# Altium PCB daboard.PcbDoc (part 1 of 2)
Units mil, origin at the board's own origin, x right, y up, seen from the top; angles counter-clockwise.
Board outline 3875 x 2400 mil, 2 copper layers (Top Layer, Bottom Layer); 197 components, 182 nets, 856 pads, 128 vias.
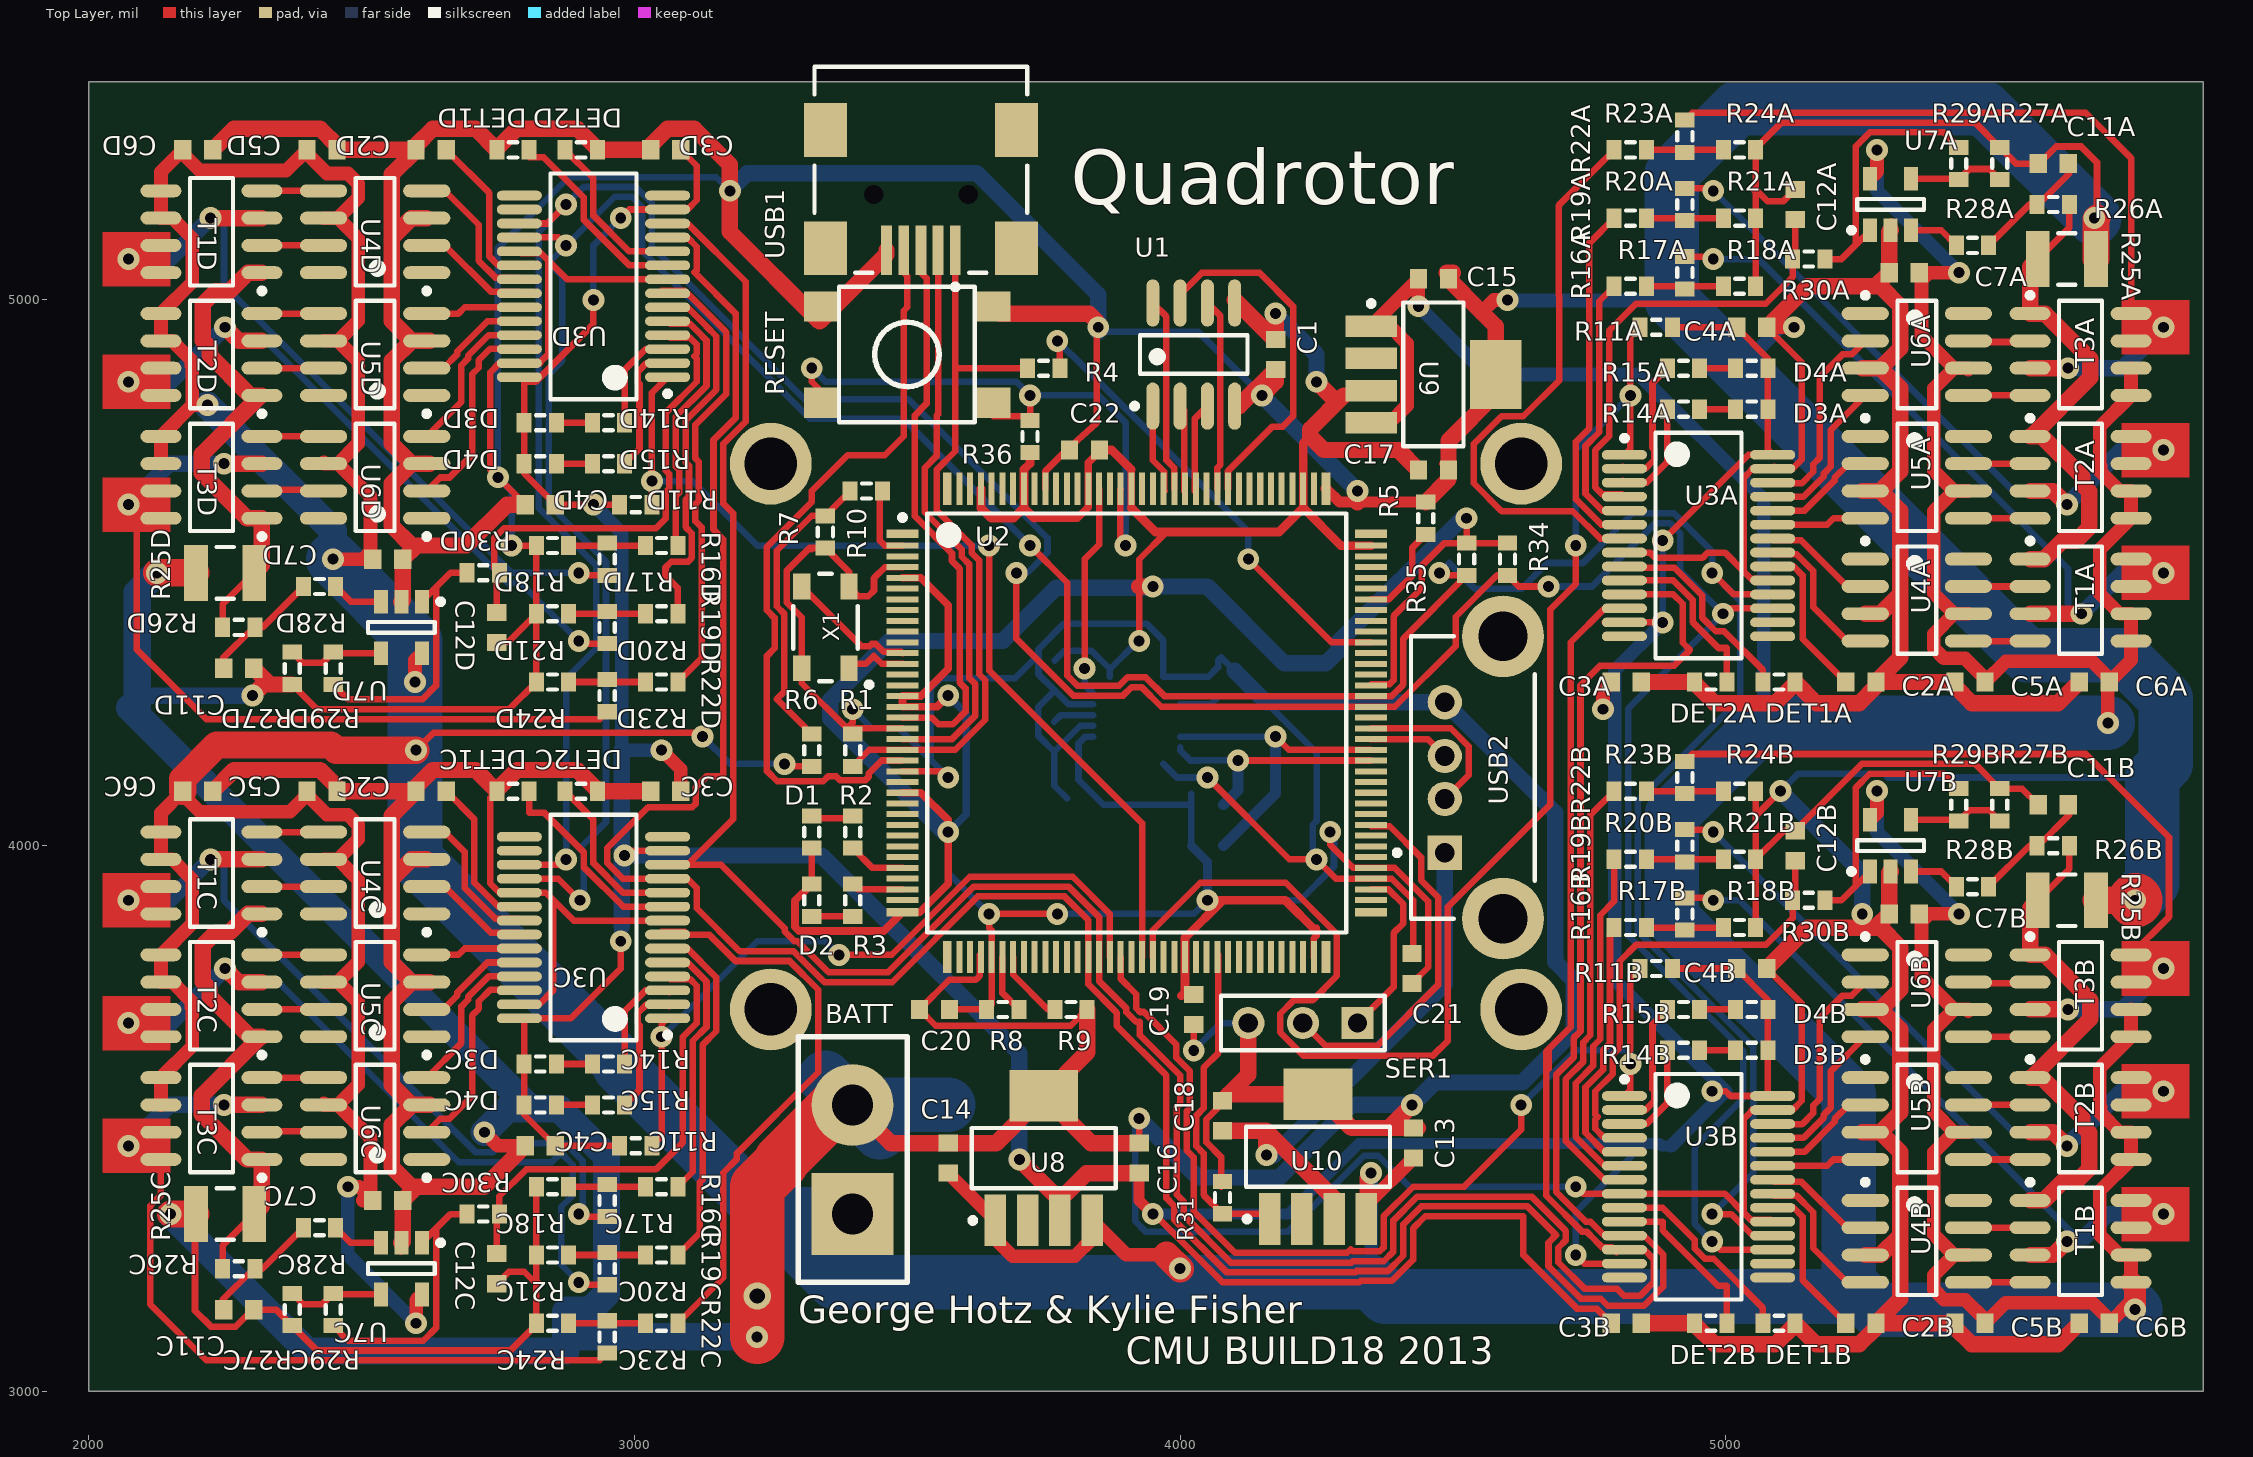
[diagram p0: Top Layer view]
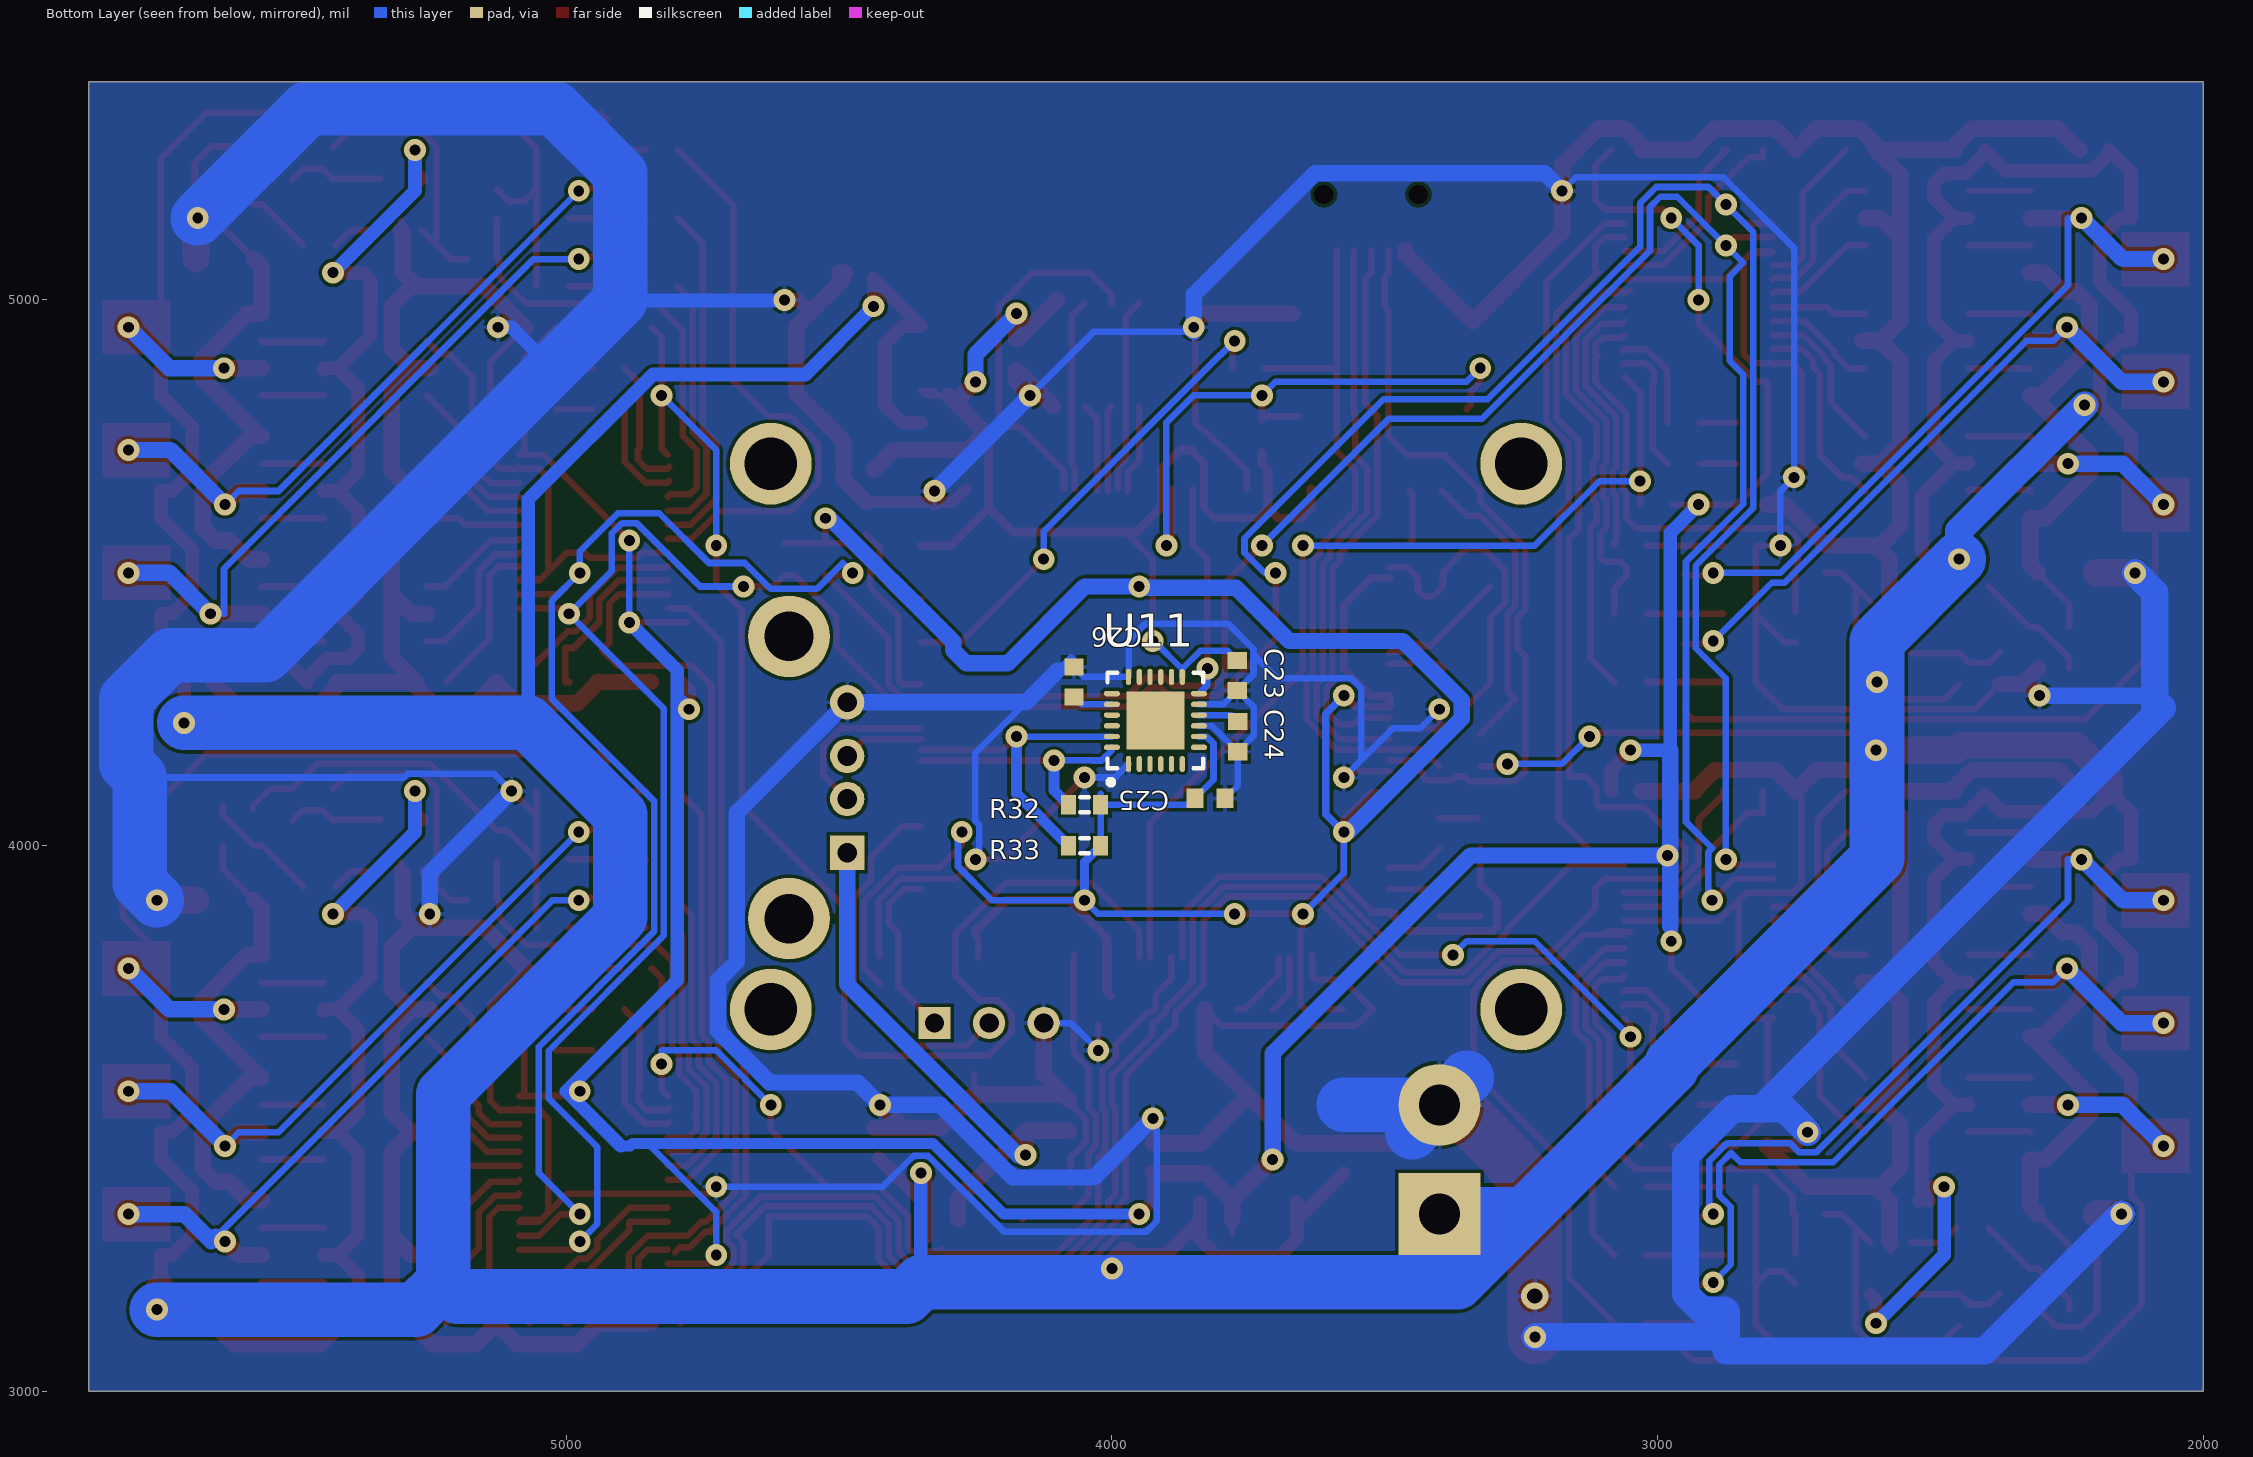
[diagram p1: Bottom Layer view, seen from below]

## Layer stack, top to bottom
Top Layer: signal copper 1.4
Dielectric: dielectric 12.6, FR-4, Dk 4.8
Bottom Layer: signal copper 1.4

## Board outline
2000,3000 2000,5400 5875,5400 5875,3000

## Design rules (kind name [scope] priority, off if disabled: settings)
Clearance "Clearance~Sunstone Circuits" [All] p1: gap=6 // Sunstone Circuits Minimum Clearance Rule (Double Sided)
HoleSize "HoleSize~Sunstone Circuits" [All] p1: absolutevalues=TRUE maxlimit=251 minlimit=16 maxpercent=80.000 minpercent=20.000 // SSC Hole Size Rule For Single Sided & Double Sided Designs.
HoleSize Testpoint [All] p2: absolutevalues=TRUE maxlimit=100 minlimit=1 maxpercent=80.000 minpercent=20.000
HoleSize TestPointUsage [All] p3: absolutevalues=TRUE maxlimit=100 minlimit=1 maxpercent=80.000 minpercent=20.000
MinimumAnnularRing "MinimumAnnularRing~Sunstone Circuits" [All] p1: minimumring=7 // Sunstone Circuits Minimum Annular Ring (Double Sided)
PlaneClearance "PlaneClearance~Sunstone Circuits" [All] p1: clearance=12 // Sunstone Circuits Power Plane Clearance Rule (Double Sided)
PlaneConnect "PlaneConnect~Sunstone Circuits" [All] p1: planeconnectstyle=Relief reliefexpansion=10 reliefentries=4 reliefconductorwidth=8 reliefairgap=10 // Sunstone Circuits Power Plane Connect Rule (Double Sided)
PolygonConnect "PolygonConnect~Sunstone Circuits" [All] p1: connectstyle=Relief reliefconductorwidth=8 reliefentries=4 polygonreliefangle="90 Angle" // Sunstone Circuits Polygon Connect Style (Double Sided)
RoomDefinition M2 [InComponentClass('M2')] p1: confinementstyle=ConfineIn formatcopy=TRUE lockcomponents=FALSE outline 4675,3025 5850,3025 5850,4200 4675,4200
RoomDefinition M4 [InComponentClass('M4')] p2: confinementstyle=ConfineIn formatcopy=TRUE lockcomponents=FALSE outline 3200,4200 2025,4200 2025,5375 3200,5375
RoomDefinition M3 [InComponentClass('M3')] p3: confinementstyle=ConfineIn formatcopy=TRUE lockcomponents=FALSE outline 2025,4200 3200,4200 3200,3025 2025,3025
RoomDefinition M1 [InComponentClass('M1')] p4: confinementstyle=ConfineIn formatcopy=FALSE lockcomponents=FALSE outline 4675,5375 5850,5375 5850,4200 4675,4200
RoomDefinition power [InComponentClass('power')] p5: confinementstyle=ConfineIn formatcopy=TRUE lockcomponents=FALSE outline 3225,3175 4550,3175 4550,3675 3225,3675
RoomDefinition mcu [InComponentClass('mcu')] p6: confinementstyle=ConfineIn formatcopy=TRUE lockcomponents=FALSE outline 3200,3600 4675,3600 4675,5450 3200,5450
RoomDefinition imu [InComponentClass('imu')] p7: confinementstyle=ConfineIn formatcopy=TRUE lockcomponents=FALSE outline 3670.28,4424.8 3670.28,4049.8 4095.28,4049.8 4095.28,4424.8
RoutingVias "RoutingVias~Sunstone Circuits" [All] p1: holewidth=16 width=30 viastyle="Through Hole" minholewidth=16 minwidth=30 maxholewidth=20 maxwidth=40 // Sunstone Circuits Routing Vias Rule (Double Sided)
ShortCircuit "ShortCircuit~Sunstone Circuits" [All] p1: allowed=FALSE // Sunstone Circuits Short Circuit Rule~Do Not Allow (Double Sided)
SilkscreenOverComponentPads [All] p1: minsilkscreentomaskgap=10
SolderMaskExpansion "SolderMaskExpansion~Sunstone Circuits" [All] p1: expansion=3 // Sunstone Circuits Solder Mask Expansion Rule (Double Sided)
ViasUnderSMD "ViasUnderSMD~Sunstone Circuits" [All] p1: allowed=FALSE // Sunstone Circuits Vias Under SMD~Do Not Allow (Double Sided)
Width "Width~Sunstone Circuits" [All] p1: maxlimit=100 minlimit=6 preferedwidth=10 // Sunstone Circuits Minimum Width Rule (Double Sided)
23 further rules are at their usual default settings.

## Classes and differential pairs
channel class motor_controller: M1 M2 M3 M4
component class M2: C2B C3B C4B C5B C6B C7B C11B C12B D3B D4B DET1B DET2B R11B R14B R15B R16B R17B R18B R19B R20B R21B R22B R23B R24B R25B R26B R27B R28B R29B R30B T1B T2B T3B U3B U4B U5B U6B U7B
component class imu: C23 C24 C25 C26 U11
component class mcu: C1 C15 C17 C19 C20 C21 C22 D1 D2 R1 R2 R3 R4 R5 R6 R7 R8 R9 R10 R32 R33 R34 R35 R36 RESET SER1 U1 U2 U9 USB1 USB2 X1
component class power: BATT C13 C14 C16 C18 R31 U8 U10
component class M1: C2A C3A C4A C5A C6A C7A C11A C12A D3A D4A DET1A DET2A R11A R14A R15A R16A R17A R18A R19A R20A R21A R22A R23A R24A R25A R26A R27A R28A R29A R30A T1A T2A T3A U3A U4A U5A U6A U7A
component class M3: C2C C3C C4C C5C C6C C7C C11C C12C D3C D4C DET1C DET2C R11C R14C R15C R16C R17C R18C R19C R20C R21C R22C R23C R24C R25C R26C R27C R28C R29C R30C T1C T2C T3C U3C U4C U5C U6C U7C
component class M4: C2D C3D C4D C5D C6D C7D C11D C12D D3D D4D DET1D DET2D R11D R14D R15D R16D R17D R18D R19D R20D R21D R22D R23D R24D R25D R26D R27D R28D R29D R30D T1D T2D T3D U3D U4D U5D U6D U7D

## Components (designator, comment, footprint, x,y, rotation, side; value= is the part's Value field where it differs from the comment)
BATT "BS2" PCBComponent_1 3400,3425 r90 top
C1 "0.1uF" 1608[0603] 4175,4900 r90 top
C2A "10uF" 1608[0603] 5247.44,4300 r180 top (schematic designator C2)
C2B "10uF" 1608[0603] 5247.44,3125 r180 top (schematic designator C2)
C2C "10uF" 1608[0603] 2627.56,4100 r0 top (schematic designator C2)
C2D "10uF" 1608[0603] 2627.56,5275 r0 top (schematic designator C2)
C3A "0.1uF" 1608[0603] 4817.52,4300 r180 top (schematic designator C3)
C3B "0.1uF" 1608[0603] 4817.52,3125 r180 top (schematic designator C3)
C3C "0.1uF" 1608[0603] 3057.48,4100 r0 top (schematic designator C3)
C3D "0.1uF" 1608[0603] 3057.48,5275 r0 top (schematic designator C3)
C4A "0.1uF" 1608[0603] 5047.44,4950 r180 top (schematic designator C4)
C4B "0.1uF" 1608[0603] 5047.44,3775 r180 top (schematic designator C4)
C4C "0.1uF" 1608[0603] 2827.56,3450 r0 top (schematic designator C4)
C4D "0.1uF" 1608[0603] 2827.56,4625 r0 top (schematic designator C4)
C5A "1uF" 1608[0603] 5447.44,4300 r0 top (schematic designator C5)
C5B "1uF" 1608[0603] 5447.44,3125 r0 top (schematic designator C5)
C5C "1uF" 1608[0603] 2427.56,4100 r180 top (schematic designator C5)
C5D "1uF" 1608[0603] 2427.56,5275 r180 top (schematic designator C5)
C6A "1uF" 1608[0603] 5675,4300 r0 top (schematic designator C6)
C6B "1uF" 1608[0603] 5675,3125 r0 top (schematic designator C6)
C6C "1uF" 1608[0603] 2200,4100 r180 top (schematic designator C6)
C6D "1uF" 1608[0603] 2200,5275 r180 top (schematic designator C6)
C7A "1uF" 1608[0603] 5326.97,5050 r0 top (schematic designator C7)
C7B "1uF" 1608[0603] 5326.97,3875 r0 top (schematic designator C7)
C7C "1uF" 1608[0603] 2548.03,3350 r180 top (schematic designator C7)
C7D "1uF" 1608[0603] 2548.03,4525 r180 top (schematic designator C7)
C11A "56pF" 1608[0603] 5600,5250 r0 top (schematic designator C11)
C11B "56pF" 1608[0603] 5600,4075 r0 top (schematic designator C11)
C11C "56pF" 1608[0603] 2275,3150 r180 top (schematic designator C11)
C11D "56pF" 1608[0603] 2275,4325 r180 top (schematic designator C11)
C12A "33pF" 1608[0603] 5126.97,5175 r270 top (schematic designator C12)
C12B "33pF" 1608[0603] 5126.97,4000 r270 top (schematic designator C12)
C12C "33pF" 1608[0603] 2748.03,3225 r90 top (schematic designator C12)
C12D "33pF" 1608[0603] 2748.03,4400 r90 top (schematic designator C12)
C13 "1uF" 1608[0603] 4427.56,3455.12 r270 top
C14 "1uF" 1608[0603] 3575,3427.56 r270 top
C15 "1uF" 1608[0603] 4464.17,5038.58 r180 top
C16 "1uF" 1608[0603] 3925,3427.56 r270 top
C17 "1uF" 1608[0603] 4464.17,4688.58 r180 top
C18 "1uF" 1608[0603] 4077.56,3505.12 r270 top
C19 "0.1uF" 1608[0603] 4025,3700 r90 top
C20 "0.1uF" 1608[0603] 3550,3700 r0 top
C21 "0.1uF" 1608[0603] 4425,3775 r270 top
C22 "0.1uF" 1608[0603] 3825,4725 r0 top
C23 "" 1608[0603] 3770.28,4311.81 r90 bottom
C24 "" 1608[0603] 3769.49,4199.8 r90 bottom
C25 "" 1608[0603] 3820.28,4086.81 r180 bottom
C26 "" 1608[0603] 4069.49,4299.8 r90 bottom
D1 "LED" J1-0603 3325,4025 r90 top
D2 "LED" J1-0603 3325,3900 r270 top
D3A "LED" J1-0603 5047.44,4800 r180 top (schematic designator D3)
D3B "LED" J1-0603 5047.44,3625 r180 top (schematic designator D3)
D3C "LED" J1-0603 2827.56,3600 r0 top (schematic designator D3)
D3D "LED" J1-0603 2827.56,4775 r0 top (schematic designator D3)
D4A "LED" J1-0603 5047.44,4875 r180 top (schematic designator D4)
D4B "LED" J1-0603 5047.44,3700 r180 top (schematic designator D4)
D4C "LED" J1-0603 2827.56,3525 r0 top (schematic designator D4)
D4D "LED" J1-0603 2827.56,4700 r0 top (schematic designator D4)
DET1A "1k" J1-0603 5097.44,4300 r180 top (schematic designator DET1)
DET1B "1k" J1-0603 5097.44,3125 r180 top (schematic designator DET1)
DET1C "1k" J1-0603 2777.56,4100 r0 top (schematic designator DET1)
DET1D "1k" J1-0603 2777.56,5275 r0 top (schematic designator DET1)
DET2A "1k" J1-0603 4972.44,4300 r0 top (schematic designator DET2)
DET2B "1k" J1-0603 4972.44,3125 r0 top (schematic designator DET2)
DET2C "1k" J1-0603 2902.56,4100 r180 top (schematic designator DET2)
DET2D "1k" J1-0603 2902.56,5275 r180 top (schematic designator DET2)
R1 "10K" J1-0603 3400,4175 r270 top
R2 "470R" J1-0603 3400,4025 r270 top
R3 "470R" J1-0603 3400,3900 r90 top
R4 "1K" J1-0603 3750,4875 r0 top
R5 "1K" J1-0603 4450,4600 r270 top
R6 "1k" J1-0603 3325,4175 r90 top
R7 "1k" J1-0603 3350,4575 r270 top
R8 "1K" J1-0603 3675,3700 r0 top
R9 "1K" J1-0603 3800,3700 r180 top
R10 "1k" J1-0603 3425,4650 r180 top
R11A "10k" J1-0603 4872.44,4950 r180 top (schematic designator R11)
R11B "10k" J1-0603 4872.44,3775 r180 top (schematic designator R11)
R11C "10k" J1-0603 3002.56,3450 r0 top (schematic designator R11)
R11D "10k" J1-0603 3002.56,4625 r0 top (schematic designator R11)
R14A "470R" J1-0603 4922.44,4800 r180 top (schematic designator R14)
R14B "470R" J1-0603 4922.44,3625 r180 top (schematic designator R14)
R14C "470R" J1-0603 2952.56,3600 r0 top (schematic designator R14)
R14D "470R" J1-0603 2952.56,4775 r0 top (schematic designator R14)
R15A "470R" J1-0603 4922.44,4875 r180 top (schematic designator R15)
R15B "470R" J1-0603 4922.44,3700 r180 top (schematic designator R15)
R15C "470R" J1-0603 2952.56,3525 r0 top (schematic designator R15)
R15D "470R" J1-0603 2952.56,4700 r0 top (schematic designator R15)
R16A "330R" J1-0603 4825,5025 r0 top (schematic designator R16)
R16B "330R" J1-0603 4825,3850 r0 top (schematic designator R16)
R16C "330R" J1-0603 3050,3375 r180 top (schematic designator R16)
R16D "330R" J1-0603 3050,4550 r180 top (schematic designator R16)
R17A "10k" J1-0603 4925,5050 r270 top (schematic designator R17)
R17B "10k" J1-0603 4925,3875 r270 top (schematic designator R17)
R17C "10k" J1-0603 2950,3350 r90 top (schematic designator R17)
R17D "10k" J1-0603 2950,4525 r90 top (schematic designator R17)
R18A "1.74k" J1-0603 5025,5025 r0 top (schematic designator R18)
R18B "1.74k" J1-0603 5025,3850 r0 top (schematic designator R18)
R18C "1.74k" J1-0603 2850,3375 r180 top (schematic designator R18)
R18D "1.74k" J1-0603 2850,4550 r180 top (schematic designator R18)
R19A "330R" J1-0603 4825,5150 r0 top (schematic designator R19)
R19B "330R" J1-0603 4825,3975 r0 top (schematic designator R19)
R19C "330R" J1-0603 3050,3250 r180 top (schematic designator R19)
R19D "330R" J1-0603 3050,4425 r180 top (schematic designator R19)
R20A "10k" J1-0603 4925,5175 r270 top (schematic designator R20)
R20B "10k" J1-0603 4925,4000 r270 top (schematic designator R20)
R20C "10k" J1-0603 2950,3225 r90 top (schematic designator R20)
R20D "10k" J1-0603 2950,4400 r90 top (schematic designator R20)
R21A "1.74k" J1-0603 5025,5150 r0 top (schematic designator R21)
R21B "1.74k" J1-0603 5025,3975 r0 top (schematic designator R21)
R21C "1.74k" J1-0603 2850,3250 r180 top (schematic designator R21)
R21D "1.74k" J1-0603 2850,4425 r180 top (schematic designator R21)
R22A "330R" J1-0603 4825,5275 r0 top (schematic designator R22)
R22B "330R" J1-0603 4825,4100 r0 top (schematic designator R22)
R22C "330R" J1-0603 3050,3125 r180 top (schematic designator R22)
R22D "330R" J1-0603 3050,4300 r180 top (schematic designator R22)
R23A "10k" J1-0603 4925,5300 r90 top (schematic designator R23)
R23B "10k" J1-0603 4925,4125 r90 top (schematic designator R23)
R23C "10k" J1-0603 2950,3100 r270 top (schematic designator R23)
R23D "10k" J1-0603 2950,4275 r270 top (schematic designator R23)
R24A "1.74k" J1-0603 5025,5275 r0 top (schematic designator R24)
R24B "1.74k" J1-0603 5025,4100 r0 top (schematic designator R24)
R24C "1.74k" J1-0603 2850,3125 r180 top (schematic designator R24)
R24D "1.74k" J1-0603 2850,4300 r180 top (schematic designator R24)
R25A "50m" 14-1210 5625,5075 r180 top (schematic designator R25)
R25B "50m" 14-1210 5625,3900 r180 top (schematic designator R25)
R25C "50m" 14-1210 2250,3325 r0 top (schematic designator R25)
R25D "50m" 14-1210 2250,4500 r0 top (schematic designator R25)
R26A "1K" J1-0603 5600,5175 r180 top (schematic designator R26)
R26B "1K" J1-0603 5600,4000 r180 top (schematic designator R26)
R26C "1K" J1-0603 2275,3225 r0 top (schematic designator R26)
R26D "1K" J1-0603 2275,4400 r0 top (schematic designator R26)
R27A "2K" J1-0603 5501.97,5250 r270 top (schematic designator R27)
R27B "2K" J1-0603 5501.97,4075 r270 top (schematic designator R27)
R27C "2K" J1-0603 2373.03,3150 r90 top (schematic designator R27)
R27D "2K" J1-0603 2373.03,4325 r90 top (schematic designator R27)
R28A "1K" J1-0603 5451.97,5100 r180 top (schematic designator R28)
R28B "1K" J1-0603 5451.97,3925 r180 top (schematic designator R28)
R28C "1K" J1-0603 2423.03,3300 r0 top (schematic designator R28)
R28D "1K" J1-0603 2423.03,4475 r0 top (schematic designator R28)
R29A "100K" J1-0603 5426.97,5250 r90 top (schematic designator R29)
R29B "100K" J1-0603 5426.97,4075 r90 top (schematic designator R29)
R29C "100K" J1-0603 2448.03,3150 r270 top (schematic designator R29)
R29D "100K" J1-0603 2448.03,4325 r270 top (schematic designator R29)
R30A "1K" J1-0603 5151.97,5075 r180 top (schematic designator R30)
R30B "1K" J1-0603 5151.97,3900 r180 top (schematic designator R30)
R30C "1K" J1-0603 2723.03,3325 r0 top (schematic designator R30)
R30D "1K" J1-0603 2723.03,4500 r0 top (schematic designator R30)
R31 "10k" J1-0603 4077.56,3355.12 r270 top
R32 "4.7k" J1-0603 4050,4075 r180 bottom
R33 "4.7k" J1-0603 4050,4000 r180 bottom
R34 "4.7k" J1-0603 4600,4525 r90 top
R35 "4.7k" J1-0603 4525,4525 r90 top
R36 "4.7k" J1-0603 3725,4750 r270 top
RESET "BUTTON" B3FS_SWITCH 3500,4900 r0 top
SER1 "Header 3" HDR1X3 4325,3675 r180 top
T1A "SI4532DY" SOIC127P600-8L 5650,4450 r0 top (schematic designator T1)
T1B "SI4532DY" SOIC127P600-8L 5650,3275 r0 top (schematic designator T1)
T1C "SI4532DY" SOIC127P600-8L 2225,3950 r180 top (schematic designator T1)
T1D "SI4532DY" SOIC127P600-8L 2225,5125 r180 top (schematic designator T1)
T2A "SI4532DY" SOIC127P600-8L 5650,4675 r0 top (schematic designator T2)
T2B "SI4532DY" SOIC127P600-8L 5650,3500 r0 top (schematic designator T2)
T2C "SI4532DY" SOIC127P600-8L 2225,3725 r180 top (schematic designator T2)
T2D "SI4532DY" SOIC127P600-8L 2225,4900 r180 top (schematic designator T2)
T3A "SI4532DY" SOIC127P600-8L 5650,4900 r0 top (schematic designator T3)
T3B "SI4532DY" SOIC127P600-8L 5650,3725 r0 top (schematic designator T3)
T3C "SI4532DY" SOIC127P600-8L 2225,3500 r180 top (schematic designator T3)
T3D "SI4532DY" SOIC127P600-8L 2225,4675 r180 top (schematic designator T3)
U1 "W25Q80BV" D8_N 4025,4900 r90 top
U2 "LPC4330FBD144" SOT486-1_V 3920.47,4225 r0 top
U3A "DSPIC33FJ12MC202-E/SS" SSOP-SS28_N 4950,4550 r0 top (schematic designator U3)
U3B "DSPIC33FJ12MC202-E/SS" SSOP-SS28_N 4950,3375 r0 top (schematic designator U3)
U3C "DSPIC33FJ12MC202-E/SS" SSOP-SS28_N 2925,3850 r180 top (schematic designator U3)
U3D "DSPIC33FJ12MC202-E/SS" SSOP-SS28_N 2925,5025 r180 top (schematic designator U3)
U4A "TC4428ACOA" SOIC-OA8_N 5350,4450 r0 top (schematic designator U4)
U4B "TC4428ACOA" SOIC-OA8_N 5350,3275 r0 top (schematic designator U4)
U4C "TC4428ACOA" SOIC-OA8_N 2525,3950 r180 top (schematic designator U4)
U4D "TC4428ACOA" SOIC-OA8_N 2525,5125 r180 top (schematic designator U4)
U5A "TC4428ACOA" SOIC-OA8_N 5350,4675 r0 top (schematic designator U5)
U5B "TC4428ACOA" SOIC-OA8_N 5350,3500 r0 top (schematic designator U5)
U5C "TC4428ACOA" SOIC-OA8_N 2525,3725 r180 top (schematic designator U5)
U5D "TC4428ACOA" SOIC-OA8_N 2525,4900 r180 top (schematic designator U5)
U6A "TC4428ACOA" SOIC-OA8_N 5350,4900 r0 top (schematic designator U6)
U6B "TC4428ACOA" SOIC-OA8_N 5350,3725 r0 top (schematic designator U6)
U6C "TC4428ACOA" SOIC-OA8_N 2525,3500 r180 top (schematic designator U6)
U6D "TC4428ACOA" SOIC-OA8_N 2525,4675 r180 top (schematic designator U6)
U7A "MCP6021T-E/OT" SOT-23-OT5_N 5301.97,5175 r90 top (schematic designator U7)
U7B "MCP6021T-E/OT" SOT-23-OT5_N 5301.97,4000 r90 top (schematic designator U7)
U7C "MCP6021T-E/OT" SOT-23-OT5_N 2573.03,3225 r270 top (schematic designator U7)
U7D "MCP6021T-E/OT" SOT-23-OT5_N 2573.03,4400 r270 top (schematic designator U7)
U8 "LP38692MP-3.3/NOPB" MP05A_N 3750,3427.56 r90 top
U9 "LP38692MP-3.3/NOPB" MP05A_N 4464.17,4863.58 r0 top
U10 "LP38692MP-5.0/NOPB" MP05A_N 4252.56,3430.12 r90 top
U11 "mpu6050" QFN-24_N 3920.28,4229.53 r90 bottom
USB1 "USB" USB/SM0.8-6H5 3525,5400 r90 top
USB2 "USBA" USB2.5-2V4A 4650,4125 r0 top
X1 "12mhz" 2SMX-3SMXB 3350,4400 r90 top

## Footprints (in the part's own frame and the unit in brackets; to place one, negate y for a bottom-side part, rotate by r counter-clockwise, add the part's x,y. Pads: shape width x height; smd on the part's side, far side on the other; paste and mask are expansions set on the pad)
2SMX-3SMXB [mm] "Quartz Crystal, SM; Body 6.0 x 3.5 mm (LxW)"
  rect 1.2x0.8 smd: 1(-1.9,-1.1) 2(1.9,-1.1) 3(1.9,1.1) 4(-1.9,1.1)
  silkscreen extent -2.79,-2.16 2.5,1.5
14-1210 [mm] "Chip Resistor, Body 3.2x2.5mm, IPC High Density"
  rect 1.1x2.6 smd: 1(-1.35,0) 2(1.35,0)
  silkscreen extent -0.4,-1.2 0.4,1.2, body extent -1.68,-1.32 1.68,1.32, height 0.9
1608[0603] [mm] "Chip Capacitor, Body 1.6x0.8mm, IPC High Density"
  rect 0.8x0.9 smd: 1(-0.7,0) 2(0.7,0)
  body extent -0.87,-0.48 0.87,0.48, height 1.3
B3FS_SWITCH [mm]
  rect 1.6x1.4 smd: 1(3.998,-2.244) 2(-4.012,-2.244) 3(3.998,2.246) 4(-4.012,2.246)
  silkscreen extent -3.17,-3.15 3.14,3.16, body extent -4.57,-3.15 4.57,3.16, height 4.57
D8_N [mm] "SOIC, 8-Leads, Body 4.9x3.9mm, Pitch 1.27mm, IPC Medium Density"
  oval 2.2x0.6 smd: 1(-2.4,1.905) 2(-2.4,0.635) 3(-2.4,-0.635) 4(-2.4,-1.905) 5(2.4,-1.905) 6(2.4,-0.635) 7(2.4,0.635) 8(2.4,1.905)
  silkscreen extent -2.52,-2.5 0.9,2.88, body extent -2,-2.5 2,2.5, height 1.75
HDR1X3 [mm] "Connector; Header; 3 Position"
  rect 1.5x1.5 hole 0.9: 1(0,0)
  round 1.5 hole 0.9: 2(2.54,0) 3(5.08,0)
  silkscreen extent -1.27,-1.27 6.35,1.27
J1-0603 [mm] "Chip Resistor, Body 1.6x0.8mm, IPC High Density"
  rect 0.7x0.9 smd: 1(-0.75,0) 2(0.75,0)
  silkscreen extent -0.2,-0.35 0.2,0.35, body extent -0.85,-0.48 0.85,0.48, height 0.9
MP05A_N [mm] "SOT223, 5-Leads, Body 6.5x3.5mm, Pitch 1.5mm, Lead Span 7mm, IPC Medium Density"
  rect 2.4x1 smd: 1(-2.9,2.25) 2(-2.9,0.75) 3(-2.9,-0.75) 4(-2.9,-2.25)
  rect 2.4x3.2 smd: 5(2.9,0)
  silkscreen extent -3.02,-3.35 1.4,3.42, body extent -1.86,-3.35 1.86,3.35, height 1.8
PCBComponent_1 [mil]
  rect 150x150 hole 75: 1(-100,0)
  round 150 hole 75: 2(100,0)
  silkscreen extent -225,-100 225,100
QFN-24_N [mm] "QFN, 24-Leads, Body 4x4mm, Pitch 0.5mm, Thermal Pad 2.7x2.7mm, IPC Medium Density"
  oval 0.75x0.25 smd: 1(-2.025,1.25) 2(-2.025,0.75) 3(-2.025,0.25) 4(-2.025,-0.25) 5(-2.025,-0.75) 6(-2.025,-1.25) 13(2.025,-1.25) 14(2.025,-0.75) 15(2.025,-0.25) 16(2.025,0.25) 17(2.025,0.75) 18(2.025,1.25)
  oval 0.25x0.75 smd: 7(-1.25,-2.025) 8(-0.75,-2.025) 9(-0.25,-2.025) 10(0.25,-2.025) 11(0.75,-2.025) 12(1.25,-2.025) 19(1.25,2.025) 20(0.75,2.025) 21(0.25,2.025) 22(-0.25,2.025) 23(-0.75,2.025) 24(-1.25,2.025)
  rect 2.7x2.7 smd paste-1.35: 25(0,0)
  silkscreen extent -3,-2.22 2.22,2.22, body extent -2.07,-2.07 2.07,2.07, height 0.8
SOIC127P600-8L [mm] "SOIC, 8-Leads, Body 4.9x3.9mm, Pitch 1.27mm, IPC High Density"
  oval 1.9x0.6 smd: 1(-2.35,1.905) 2(-2.35,0.635) 3(-2.35,-0.635) 4(-2.35,-1.905) 5(2.35,-1.905) 6(2.35,-0.635) 7(2.35,0.635) 8(2.35,1.905)
  silkscreen extent -2.47,-2.5 1,2.88, body extent -2,-2.5 2,2.5, height 1.75
SOIC-OA8_N [mm] "SOIC, 8-Leads, Body 4.9x3.9mm, Pitch 1.27mm, IPC Medium Density"
  oval 2.2x0.6 smd: 1(-2.4,1.905) 2(-2.4,0.635) 3(-2.4,-0.635) 4(-2.4,-1.905) 5(2.4,-1.905) 6(2.4,-0.635) 7(2.4,0.635) 8(2.4,1.905)
  silkscreen extent -2.52,-2.5 0.9,2.88, body extent -2,-2.5 2,2.5, height 1.75
SOT486-1_V [mm] "Thin QFP, 144-Leads, Body 20x20mm, Pitch 0.5mm, NXP Recommended"
  rect 1.5x0.4 smd: 1(-10.9,8.81) 36(-10.9,-8.81) 73(10.9,-8.81) 108(10.9,8.81)
  rect 1.5x0.28 smd: 2(-10.9,8.25) 3(-10.9,7.75) 4(-10.9,7.25) 5(-10.9,6.75) 6(-10.9,6.25) 7(-10.9,5.75) 8(-10.9,5.25) 9(-10.9,4.75) 10(-10.9,4.25) 11(-10.9,3.75) 12(-10.9,3.25) 13(-10.9,2.75) 14(-10.9,2.25) 15(-10.9,1.75) 16(-10.9,1.25) 17(-10.9,0.75) 18(-10.9,0.25) 19(-10.9,-0.25) 20(-10.9,-0.75) 21(-10.9,-1.25) 22(-10.9,-1.75) 23(-10.9,-2.25) 24(-10.9,-2.75) 25(-10.9,-3.25) 26(-10.9,-3.75) 27(-10.9,-4.25) 28(-10.9,-4.75) 29(-10.9,-5.25) 30(-10.9,-5.75) 31(-10.9,-6.25) 32(-10.9,-6.75) 33(-10.9,-7.25) 34(-10.9,-7.75) 35(-10.9,-8.25) 74(10.9,-8.25) 75(10.9,-7.75) 76(10.9,-7.25) 77(10.9,-6.75) 78(10.9,-6.25) 79(10.9,-5.75) 80(10.9,-5.25) 81(10.9,-4.75) 82(10.9,-4.25) 83(10.9,-3.75) 84(10.9,-3.25) 85(10.9,-2.75) 86(10.9,-2.25) 87(10.9,-1.75) 88(10.9,-1.25) 89(10.9,-0.75) 90(10.9,-0.25) 91(10.9,0.25) 92(10.9,0.75) 93(10.9,1.25) 94(10.9,1.75) 95(10.9,2.25) 96(10.9,2.75) 97(10.9,3.25) 98(10.9,3.75) 99(10.9,4.25) 100(10.9,4.75) 101(10.9,5.25) 102(10.9,5.75) 103(10.9,6.25) 104(10.9,6.75) 105(10.9,7.25) 106(10.9,7.75) 107(10.9,8.25)
  rect 0.4x1.5 smd: 37(-8.81,-10.9) 72(8.81,-10.9) 109(8.81,10.9) 144(-8.81,10.9)
  rect 0.28x1.5 smd: 38(-8.25,-10.9) 39(-7.75,-10.9) 40(-7.25,-10.9) 41(-6.75,-10.9) 42(-6.25,-10.9) 43(-5.75,-10.9) 44(-5.25,-10.9) 45(-4.75,-10.9) 46(-4.25,-10.9) 47(-3.75,-10.9) 48(-3.25,-10.9) 49(-2.75,-10.9) 50(-2.25,-10.9) 51(-1.75,-10.9) 52(-1.25,-10.9) 53(-0.75,-10.9) 54(-0.25,-10.9) 55(0.25,-10.9) 56(0.75,-10.9) 57(1.25,-10.9) 58(1.75,-10.9) 59(2.25,-10.9) 60(2.75,-10.9) 61(3.25,-10.9) 62(3.75,-10.9) 63(4.25,-10.9) 64(4.75,-10.9) 65(5.25,-10.9) 66(5.75,-10.9) 67(6.25,-10.9) 68(6.75,-10.9) 69(7.25,-10.9) 70(7.75,-10.9) 71(8.25,-10.9) 110(8.25,10.9) 111(7.75,10.9) 112(7.25,10.9) 113(6.75,10.9) 114(6.25,10.9) 115(5.75,10.9) 116(5.25,10.9) 117(4.75,10.9) 118(4.25,10.9) 119(3.75,10.9) 120(3.25,10.9) 121(2.75,10.9) 122(2.25,10.9) 123(1.75,10.9) 124(1.25,10.9) 125(0.75,10.9) 126(0.25,10.9) 127(-0.25,10.9) 128(-0.75,10.9) 129(-1.25,10.9) 130(-1.75,10.9) 131(-2.25,10.9) 132(-2.75,10.9) 133(-3.25,10.9) 134(-3.75,10.9) 135(-4.25,10.9) 136(-4.75,10.9) 137(-5.25,10.9) 138(-5.75,10.9) 139(-6.25,10.9) 140(-6.75,10.9) 141(-7.25,10.9) 142(-7.75,10.9) 143(-8.25,10.9)
  silkscreen extent -11.02,-9.75 9.75,9.75, body extent -10,-10 10,10, height 1.6
SOT-23-OT5_N [mm] "SOT23, 5-Leads, Body 2.9x1.7mm, Pitch 0.95mm, Lead Span 2.8mm, IPC Medium Density"
  rect 1.1x0.65 smd: 1(-1.2,0.95) 2(-1.2,0) 3(-1.2,-0.95) 4(1.2,-0.95) 5(1.2,0.95)
  silkscreen extent -1.32,-1.55 0.25,1.95, body extent -0.9,-1.55 0.9,1.55, height 1.45
SSOP-SS28_N [mm] "SOP, 28-Leads, Body 10.2x5.2mm, Pitch 0.65mm, IPC Medium Density"
  oval 2.1x0.45 smd: 1(-3.45,4.225) 2(-3.45,3.575) 3(-3.45,2.925) 4(-3.45,2.275) 5(-3.45,1.625) 6(-3.45,0.975) 7(-3.45,0.325) 8(-3.45,-0.325) 9(-3.45,-0.975) 10(-3.45,-1.625) 11(-3.45,-2.275) 12(-3.45,-2.925) 13(-3.45,-3.575) 14(-3.45,-4.225) 15(3.45,-4.225) 16(3.45,-3.575) 17(3.45,-2.925) 18(3.45,-2.275) 19(3.45,-1.625) 20(3.45,-0.975) 21(3.45,-0.325) 22(3.45,0.325) 23(3.45,0.975) 24(3.45,1.625) 25(3.45,2.275) 26(3.45,2.925) 27(3.45,3.575) 28(3.45,4.225)
  silkscreen extent -3.57,-5.25 2,5.25, body extent -2.8,-5.25 2.8,5.25, height 2
USB2.5-2V4A [mm] "Connector; USB1.1, Type A, Thru-Hole; 4 Position; Vertical"
  rect 1.6x1.6 hole 0.92: 1(-4.19,-3.5)
  round 1.6 hole 0.92: 2(-4.19,-1) 3(-4.19,1) 4(-4.19,3.5)
  round 3.8 hole 2.3: 5(-1.48,6.57) 6(-1.48,-6.57)
  silkscreen extent -6.53,-6.57 0,6.57, body extent -5.76,-6.57 0,6.57, height 15
USB/SM0.8-6H5 [mm] "Connector; USB2.0, Type B, SM; 5 Position; Right Angle"
  rect 2.3x0.5 smd: 1(-7.85,-1.6) 2(-7.85,-0.8) 3(-7.85,0) 4(-7.85,0.8) 5(-7.85,1.6)
  rect 2.5x2 smd: 6(-7.75,4.45) 7(-2.25,4.45) 8(-7.75,-4.45) 9(-2.25,-4.45)
  round 0.6 hole 0.9 unplated: MH1(-5.25,2.2) MH2(-5.25,-2.2)
  silkscreen extent -9.67,-4.95 0.7,4.95, body extent -8.9,-4.95 0.7,4.95, height 3.9

## Part data
C1 C2A C2B C2C C2D C3A C3B C3C C3D C4A C4B C4C C4D C5A C5B C5C C5D C6A C6B C6C C6D C7A C7B C7C C7D C11A C11B C11C C11D C12A C12B C12C C12D C13 C14 C15 C16 C17 C18 C19 C20 C21 C22 C23 C24 C25 C26: library part "Cap Semi", "Capacitor (Semiconductor SIM Model)"
D1 D2 D3A D3B D3C D3D D4A D4B D4C D4D DET1A DET1B DET1C DET1D DET2A DET2B DET2C DET2D R1 R2 R3 R4 R5 R6 R7 R8 R9 R10 R11A R11B R11C R11D R14A R14B R14C R14D R15A R15B R15C R15D R16A R16B R16C R16D R17A R17B R17C R17D R18A R18B R18C R18D R19A R19B R19C R19D R20A R20B R20C R20D R21A R21B R21C R21D R22A R22B R22C R22D R23A R23B R23C R23D R24A R24B R24C R24D R25A R25B R25C R25D R26A R26B R26C R26D R27A R27B R27C R27D R28A R28B R28C R28D R29A R29B R29C R29D R30A R30B R30C R30D R31 R32 R33 R34 R35 R36: library part Res3, "Resistor"
SER1: "Header, 3-Pin"
U2: "32-bit ARM Cortex-M4 MCU, 264 kB SRAM, 2 HS USB with on-chip PHY, Ethernet, CAN, AES, SPIFI, SGPIO, SCT, 144-Pin LQFP"
U3A U3B U3C U3D: "High-Performance 16-bit Digital Signal Controller, 12 KB Flash, 1 KB RAM, 28-Pin SSOP, Extended High Temperature"
U4A U4B U4C U4D U5A U5B U5C U5D U6A U6B U6C U6D: "1.5A Dual High-Speed Power MOSFET Driver, Complementary, Commercial Temperature"
U7A U7B U7C U7D: "Rail-to-Rail Input/Output, 10 MHz Operational Amplifier, 5-Pin SOT-23, Extended Temperature, Tape and Reel"
U8 U9 U10: "1A Low Dropout CMOS Linear Regulators, Stable with Ceramic Output Capacitors, 5-pin SOT-223, Pb-Free"
X1: library part crystal

## Free pads (board coordinates)
  round 150 hole 96 unplated: 0(3250,3700) 0(3250,4700) 0(4625,3700) 0(4625,4700)

## Via types
v1: diameter 40, hole 20, Top Layer to Bottom Layer, 127 vias
v2: diameter 50, hole 28, Top Layer to Bottom Layer, 1 vias

## Nets (pads, with @x,y where several pads share a name; then routed paths per layer and width w, separated by ;. In a path a pad name is that pad's centre, name@x,y a point inside that pad or via, vN(x,y) a via of type N, cw(c..) or ccw(c..) an arc to the next point about the centre after c; other vN are vias at no path point)
DET1A: DET1A.2 U3A.9 | length 378
  Top Layer w12: U3A.9@4814.17,4511.61 4816.54,4509.25 4905.87,4509.25 4957,4458.13 4957,4417.43 4981.43,4393 4996.67,4393 5067.91,4321.76 DET1A.2@5067.91,4300
DET1B: DET1B.2 U3B.9 | length 367
  Top Layer w12: U3B.9@4814.17,3336.61 4884.1,3336.61 4943,3277.71 4943,3261.75 4961.75,3243 4977.71,3243 5067.91,3152.8 DET1B.2@5067.91,3125
DET1C: DET1C.2 U3C.9 | length 380.5
  Top Layer w12: DET1C.2@2807.09,4100 2807.09,4060.75 2834.51,4060.75 2907,3988.25 2907,3960.83 2979.45,3888.39 U3C.9@3060.83,3888.39
DET1D: DET1D.2 U3D.9 | length 373.5
  Top Layer w12: DET1D.2@2807.09,5275 2807.09,5261.2 2834.05,5261.2 2907,5188.25 2907,5147.29 2990.9,5063.39 U3D.9@3060.83,5063.39
DET2A: DET2A.2 U3A.10 | length 332.6
  Top Layer w12: U3A.10@4814.17,4486.02 4903.65,4486.02 4939,4450.67 4939,4409.97 4986.73,4362.24 5001.97,4362.24 DET2A.2@5001.97,4300 DET2A.2@4994.51,4300
DET2B: DET2B.2 U3B.10 | length 321.7
  Top Layer w12: U3B.10@4814.17,3311.02 4884.23,3311.02 4884.23,3295.06 4986,3193.28 5001.97,3193.28 DET2B.2@5001.97,3125 DET2B.2@4994.51,3125
DET2C: DET2C.2 U3C.10 | length 319
  Top Layer w12: DET2C.2@2880.49,4100 DET2C.2@2873.03,4100 2925,4048.03 2925,3968.29 2979.31,3913.98 U3C.10@3060.83,3913.98
DET2D: DET2D.2 U3D.10 | length 312.3
  Top Layer w12: DET2D.2@2880.49,5275 DET2D.2@2873.03,5275 2925,5223.03 2925,5154.75 2990.77,5088.98 U3D.10@3060.83,5088.98
GND: BATT.2 C1.1 C2A.1 C2B.1 C2C.1 C2D.1 C3A.1 C3B.1 C3C.1 C3D.1 C4A.1 C4B.1 C4C.1 C4D.1 C5A.1 C5B.1 C5C.1 C5D.1 C6A.1 C6B.1 C6C.1 C6D.1 C7A.1 C7B.1 C7C.1 C7D.1 C11A.1 C11B.1 C11C.1 C11D.1 C12A.1 C12B.1 C12C.1 C12D.1 C13.1 C14.1 C15.1 C16.1 C17.1 C18.1 C19.1 C20.1 C21.1 C22.1 C23.1 C24.1 C25.2 C26.2 DET1A.1 DET1B.1 DET1C.1 DET1D.1 DET2A.1 DET2B.1 DET2C.1 DET2D.1 R1.1 R5.1 R7.2 R9.1 R18A.2 R18B.2 R18C.2 R18D.2 R21A.2 R21B.2 R21C.2 R21D.2 R24A.2 R24B.2 R24C.2 R24D.2 R25A.1 R25B.1 R25C.1 R25D.1 R27A.1 R27B.1 R27C.1 R27D.1 R31.1 RESET.3 RESET.4 SER1.3 U1.4 U2.4 U2.19 U2.23 U2.40 U2.76 U2.109 U2.135 U3A.8 U3A.19 U3A.27 U3B.8 U3B.19 U3B.27 U3C.8 U3C.19 U3C.27 U3D.8 U3D.19 U3D.27 U4A.3 U4B.3 U4C.3 U4D.3 U5A.3 U5B.3 U5C.3 U5D.3 U6A.3 U6B.3 U6C.3 U6D.3 U7A.2 U7B.2 U7C.2 U7D.2 U8.5 U9.5 U10.5 U11.1 U11.9 U11.11 U11.18 USB1.5 USB2.4 X1.2 X1.4 | length 39625.4
  Top Layer w12: R25C.1@2194.88,3325 2194.88,3148.03 2224.13,3118.78 2269.37,3118.78 C11C.1@2300.59,3150 ; C11C.1@2300.59,3157.67 C11C.1@2300.59,3150 ; C11D.1@2300.59,4325 C11D.1@2300.59,4332.67 ; R27D.1@2373.03,4295.47 2418.51,4250 2770.47,4250 R24D.2@2820.47,4300 R21D.2@2820.47,4425 ; C5C.1@2452.55,4100 C5C.1@2455.12,4100 ; C5D.1@2452.56,5275 C5D.1@2455.12,5275 ; U7C.2@2573.03,3256.11 U7C.2@2573.03,3272.24 ; U7D.2@2573.03,4431.1 U7D.2@2573.03,4447.24 ; C2C.1@2600,4100 C2C.1@2602.56,4100 ; C2D.1@2600,5275 C2D.1@2602.56,5275 ; C12C.1@2748.03,3197.44 2770.09,3219.5 2798.41,3219.5 2820.47,3197.44 ; C12D.1@2748.03,4372.44 2767.91,4372.44 R21D.2@2820.47,4425 ; DET1D.1@2748.03,5275 DET1D.1@2756.5,5275 ; v1(2750,4675) C4D.1@2800,4625 2735.84,4689.16 2735.84,4867.3 2752.79,4884.25 U3D.27@2789.17,4884.25 ; DET1C.1@2756.5,4100 DET1C.1@2748.03,4100 2735.83,4087.8 2735.83,3930.93 2752.79,3913.98 U3C.19@2789.17,3913.98 2837.78,3913.98 2851.76,3900 ; v1(2775,4550) R18D.2@2820.47,4550 R21D.2@2820.47,4425 ; U3D.27@2785.94,4881.02 U3D.27@2789.17,4884.25 ; U3C.27@2789.17,3709.25 2825.56,3709.25 2851.76,3735.45 2851.76,3900 ; R18C.2@2820.47,3375 2820.47,3197.44 ; 2823.03,3200 2820.47,3197.44 ; U3D.27@2827.68,4884.25 U3D.27@2825.56,4884.25 ; U3D.19@2828.93,5085.74 U3D.19@2828.8,5085.74 ; DET2C.1@2923.62,4100 DET2C.1@2932.09,4100 ; DET2D.1@2923.62,5275 DET2D.1@2932.09,5275 ; U3C.8@3060.83,3862.8 2888.96,3862.8 2851.76,3900 ; U3D.8@3060.83,5037.8 2876.74,5037.8 2842.51,5072.03 ; R1.1@3400,4204.53 R1.1@3410.63,4215.16 ; R1.1@3400,4215.16 R1.1@3410.63,4215.16 ; v1(3400,4250) 3400,4225.79 3389.37,4215.16 3306.69,4297.83 X1.4@3306.69,4325.2 3306.69,4418.46 3278.94,4446.21 3278.94,4503.4 3321.02,4545.47 3325,4545.47 3325,4543.11 3327.36,4545.47 R7.2@3350,4545.47 3393.31,4502.17 X1.2@3393.31,4474.8 3411.11,4457 3428.51,4457 3439.06,4467.54 3439.06,4490.48 3459.01,4510.43 U2.4@3491.34,4510.43 ; U2.23@3491.34,4136.42 3563.58,4136.42 v1(3575,4125) ; U2.19@3491.34,4215.16 R1.1@3410.63,4215.16 ; U2.40@3632.87,3800 3632.87,3761.37 3625.84,3754.34 3576.78,3754.34 C20.1@3522.44,3700 3552.16,3670.28 3799.81,3670.28 R9.1@3829.53,3700 ; U2.135@3753.15,4654.13 3753.15,4686.46 3791.69,4725 3794.88,4727.86 3847.44,4775 v1@3847.44,4960.54 ; C16.1@3925,3455.12 v1(3925,3500) ; v1(4025,3625) C19.1@4025,3672.44 ; v1(4050,4125) 4200,3975 v1(4250,3975) 4285.43,3939.57 U2.76@4349.61,3939.57 4387.7,3939.57 4427.13,3900.14 4427.13,3804.69 C21.1@4425,3802.56 C21.1@4425,3797.88 ; R31.1@4075,3375 4075,3429.68 4047.85,3456.84 4047.85,3498.28 4077.56,3527.99 C18.1@4077.56,3532.68 ; U1.4@4100,4805.51 U1.4@4108.07,4805.51 ; U10.5@4240.94,3532.68 U10.5@4252.56,3544.29 U10.5@4252.56,3580.91 ; C17.1@4489.39,4690.92 4480.32,4700 C17.1@4491.73,4700 ; C17.1@4491.73,4688.58 C17.1@4491.73,4700 ; C17.1@4500,4700 C17.1@4491.73,4700 ; v1(4725,3375) 4737.8,3362.2 U3B.8@4814.17,3362.2 4998.26,3362.2 5032.49,3327.97 ; U3A.8@4814.17,4537.2 4861.05,4537.2 4871,4527.25 4957,4527.25 4966.95,4537.2 4998.26,4537.2 5032.49,4502.97 ; DET2B.1@4942.91,3125 DET2B.1@4951.38,3125 ; DET2A.1@4942.91,4300 DET2A.1@4951.38,4300 ; U3B.19@5046.07,3314.26 U3B.19@5046.21,3314.26 ; U3A.19@5046.07,4489.26 U3A.19@5046.21,4489.26 ; U3B.27@5047.32,3515.75 U3B.27@5049.44,3515.75 ; U3A.27@5047.32,4690.75 U3A.27@5049.44,4690.75 ; 5051.97,5200 5054.53,5202.56 ; R18B.2@5054.53,3850 R21B.2@5054.53,3975 ; R24B.2@5054.53,4100 5054.53,4054.53 ; R18A.2@5054.53,5025 R21A.2@5054.53,5150 5054.53,5202.56 ; C4B.1@5075,3775 5139.16,3710.84 5139.16,3532.7 5122.21,3515.75 U3B.27@5085.83,3515.75 ; C4A.1@5075,4950 5139.16,4885.84 5139.16,4707.7 5122.21,4690.75 U3A.27@5085.83,4690.75 ; U3B.27@5089.06,3518.98 U3B.27@5085.83,3515.75 ; U3A.27@5089.06,4693.98 U3A.27@5085.83,4690.75 ; v1(5100,4100) 5054.53,4054.53 ; DET1B.1@5118.5,3125 DET1B.1@5126.97,3125 ; DET1A.1@5118.5,4300 DET1A.1@5126.97,4300 ; C12A.1@5126.97,5202.56 5104.91,5180.5 5076.59,5180.5 5054.53,5202.56 ; C2B.1@5272.44,3125 C2B.1@5275,3125 ; C2A.1@5272.44,4300 C2A.1@5275,4300 ; U7B.2@5301.97,3952.76 U7B.2@5301.97,3968.89 ; U7A.2@5301.97,5127.76 U7A.2@5301.97,5143.89 ; C5B.1@5419.88,3125 C5B.1@5422.45,3125 ; C5A.1@5419.88,4300 C5A.1@5422.45,4300 ; C11B.1@5572.44,4075 5542.92,4104.53 R27B.1@5501.97,4104.53 5456.5,4150 5249.41,4150 C12B.1@5126.97,4027.56 5107.09,4027.56 R21B.2@5054.53,3975 ; C11B.1@5574.41,4067.33 C11B.1@5574.41,4075 ; C11A.1@5574.41,5242.33 C11A.1@5574.41,5250 ; R25A.1@5680.12,5075 5680.12,5150 5680.12,5251.97 5650.87,5281.22 5605.63,5281.22 C11A.1@5574.41,5250 ; C11C.1@2300.59,3150 2343.51,3150 2418.5,3075 2773.03,3075 2820.47,3122.44 2820.47,3197.44 ; U3D.27@2789.17,4884.25 U3D.27@2825.56,4884.25 ; U3D.27@2825.56,4884.25 2842.51,4901.2 2842.51,5072.03 ; U3D.19@2828.8,5085.74 2792.41,5085.74 U3D.19@2789.17,5088.98 2825.56,5088.98 U3D.19@2828.8,5085.74 ; U3D.19@2828.8,5085.74 2842.51,5072.03 ; 5032.49,3327.97 5032.49,3498.8 U3B.27@5049.44,3515.75 ; 5032.49,3327.97 U3B.19@5046.21,3314.26 ; 5032.49,4502.97 5032.49,4673.8 U3A.27@5049.44,4690.75 ; 5032.49,4502.97 U3A.19@5046.21,4489.26 ; U3B.19@5046.21,3314.26 5049.44,3311.02 U3B.19@5085.83,3311.02 5082.59,3314.26 U3B.19@5046.21,3314.26 ; U3A.19@5046.21,4489.26 5082.59,4489.26 U3A.19@5085.83,4486.02 5049.44,4486.02 U3A.19@5046.21,4489.26 ; U3B.27@5049.44,3515.75 U3B.27@5085.83,3515.75 ; U3A.27@5049.44,4690.75 U3A.27@5085.83,4690.75 ; R21B.2@5054.53,3975 5054.53,4054.53 ; 5054.53,5202.56 R24A.2@5054.53,5275 5054.53,5277.56 5101.97,5325 5456.5,5325 R27A.1@5501.97,5279.53 5531.49,5250 C11A.1@5572.44,5250 C11A.1@5574.41,5250
  Top Layer w20: U2.109@4267.32,4654.13 4291.93,4629.53 4325,4629.53 R5.1@4450,4629.53
  Top Layer w25: v1(2725,3475) 2750,3450 C4C.1@2800,3450 ; 4552.66,4977.66 4575,5000 v1(4600,5000) ; C4A.1@5075,4950 v1(5125,4950)
  Top Layer w30: C6C.1@2227.56,4100 2266.28,4138.72 2424.45,4138.72 2455.12,4108.05 C5C.1@2455.12,4100 C2C.1@2600,4100 ; C6D.1@2227.56,5275 2266.28,5313.72 2424.45,5313.72 2455.12,5283.04 C5D.1@2455.12,5275 C2D.1@2600,5275 ; v1(2300,4275) 2320.47,4295.47 2332.08,4295.47 ; C11D.1@2302.56,4325 2332.08,4295.47 ; R27D.1@2373.03,4295.47 2332.08,4295.47 ; U7C.2@2573.03,3272.24 2575.59,3274.8 C7C.1@2575.59,3350 2600.59,3375 ; U7D.2@2573.03,4447.24 2575.59,4449.8 C7D.1@2575.59,4525 2600.59,4550 ; U4C.3@2619.49,3975 2591.59,3975 2555.18,3938.59 ; U4D.3@2619.49,5150 2591.59,5150 2555.18,5113.59 ; U6C.3@2625,3525 U6C.3@2591.59,3525 ; U5C.3@2625,3750 U5C.3@2591.59,3750 ; U6D.3@2625,4700 U6D.3@2591.59,4700 ; U5D.3@2625,4925 U5D.3@2591.59,4925 ; C4C.1@2800,3450 2725,3375 2600.59,3375 ; C4D.1@2800,4625 2766.56,4625 2691.56,4550 2600.59,4550 ; C3C.1@3029.92,4100 DET2C.1@2932.09,4100 2932.09,4102.14 2895.51,4138.72 2784.61,4138.72 2748.03,4102.14 DET1C.1@2748.03,4100 2709.31,4138.72 2630.67,4138.72 2600,4108.05 C2C.1@2600,4100 ; BATT.2@3400,3525 3469.88,3455.12 C14.1@3575,3455.12 3663.39,3455.12 U8.5@3750,3541.73 ; USB1.5@3462.01,5090.94 3462.01,5083.36 3339.32,4960.68 3175,5125 v1(3175,5200) 3175,5248.2 3109.49,5313.72 3060.59,5313.72 3029.92,5283.05 C3D.1@3029.92,5275 DET2D.1@2932.09,5275 2932.09,5277.14 2895.51,5313.72 2784.61,5313.72 2748.03,5277.14 DET1D.1@2748.03,5275 2709.31,5313.72 2630.67,5313.72 2600,5283.04 C2D.1@2600,5275 ; RESET.3@3669,4975 3832.98,4975 v1@3847.44,4960.54 ; R9.1@3829.53,3700 3829.53,3621.26 U8.5@3750,3541.73 ; C16.1@3925,3455.12 3836.61,3455.12 U8.5@3750,3541.73 ; C18.1@4077.56,3532.68 C18.1@4089.18,3544.29 ; U1.4@4108.07,4805.51 C1.1@4175,4872.44 4175,4850 v1(4150,4825) ; SER1.3@4125,3675 4125,3580.11 C18.1@4089.18,3544.29 ; 4325,4629.53 v1(4325,4650) ; v1(4425,3525) 4382.68,3482.68 ; C13.1@4435.61,3482.68 C13.1@4427.56,3482.68 4382.68,3482.68 ; R5.1@4450,4629.53 4491.73,4671.26 C17.1@4491.73,4688.58 ; USB2.4@4486.12,4263.88 USB2.4@4485.04,4262.8 USB2.4@4486.31,4262.8 ; C15.1@4488.36,5050 C15.1@4500,5050 ; C17.1@4491.73,4700 4491.73,4741.73 4578.35,4828.35 U9.5@4578.35,4863.58 4578.35,4951.97 4552.66,4977.66 C15.1@4491.73,5038.58 ; C3B.1@4845.08,3125 DET2B.1@4942.91,3125 4942.91,3122.86 4979.49,3086.28 5090.39,3086.28 5126.97,3122.86 DET1B.1@5126.97,3125 5165.69,3086.28 5244.33,3086.28 5275,3116.95 C2B.1@5275,3125 ; C3A.1@4845.08,4300 DET2A.1@4942.91,4300 4942.91,4297.86 4979.49,4261.28 5090.39,4261.28 5126.97,4297.86 DET1A.1@5126.97,4300 5165.69,4261.28 5244.33,4261.28 5275,4291.95 C2A.1@5275,4300 ; C4B.1@5075,3775 5150,3850 5250,3850 ; C4A.1@5075,4950 5150,5025 5274.41,5025 ; U5B.3@5250,3475 U5B.3@5283.41,3475 ; U6B.3@5250,3700 U6B.3@5283.41,3700 ; v1(5250,3875) 5250,3850 ; U5A.3@5250,4650 U5A.3@5255.51,4650 U5A.3@5283.41,4650 ; U6A.3@5250,4875 U6A.3@5255.51,4875 U6A.3@5283.41,4875 ; U4B.3@5255.51,3250 5283.41,3250 5319.82,3286.41 ; U4A.3@5255.51,4425 5283.41,4425 5319.82,4461.41 ; U7B.2@5301.97,3952.76 5299.41,3950.2 C7B.1@5299.41,3875 5274.41,3850 ; U7A.2@5301.97,5127.76 5299.41,5125.2 C7A.1@5299.41,5050 5274.41,5025 ; C6B.1@5647.44,3125 5608.73,3086.28 5450.56,3086.28 5419.88,3116.95 C5B.1@5419.88,3125 C2B.1@5275,3125 ; C6A.1@5647.44,4300 5608.73,4261.28 5450.56,4261.28 5419.88,4291.95 C5A.1@5419.88,4300 C2A.1@5275,4300 ; 2555.18,3938.59 2555.18,3786.41 U5C.3@2591.59,3750 ; 2555.18,3938.59 2555.18,4055.18 C2C.1@2600,4100 ; 2555.18,5113.59 2555.18,5230.18 C2D.1@2600,5275 ; 2555.18,5113.59 2555.18,4961.41 U5D.3@2591.59,4925 ; U6C.3@2591.59,3525 2555.18,3561.41 2555.18,3713.59 U5C.3@2591.59,3750 ; U6C.3@2591.59,3525 2555.18,3488.59 2555.18,3411.41 2591.59,3375 2600.59,3375 ; U6D.3@2591.59,4700 2555.18,4663.59 2555.18,4586.41 2591.59,4550 2600.59,4550 ; U6D.3@2591.59,4700 2555.18,4736.41 2555.18,4888.59 U5D.3@2591.59,4925 ; C18.1@4089.18,3544.29 U10.5@4252.56,3544.29 4314.17,3482.68 4382.68,3482.68 ; 5250,3850 5274.41,3850 ; 5274.41,3850 5283.41,3850 5319.82,3813.59 5319.82,3736.41 U6B.3@5283.41,3700 ; 5274.41,5025 5283.41,5025 5319.82,4988.59 5319.82,4911.41 U6A.3@5283.41,4875 ; C2B.1@5275,3125 5319.82,3169.82 5319.82,3286.41 ; C2A.1@5275,4300 5319.82,4344.82 5319.82,4461.41 ; U5B.3@5283.41,3475 5319.82,3511.41 5319.82,3663.59 U6B.3@5283.41,3700 ; U5B.3@5283.41,3475 5319.82,3438.59 5319.82,3286.41 ; U5A.3@5283.41,4650 5319.82,4613.59 5319.82,4461.41 ; U5A.3@5283.41,4650 5319.82,4686.41 5319.82,4838.59 U6A.3@5283.41,4875
  Top Layer w50: v1(2125,4500) R25D.1@2196.85,4500 ; v1(2150,3325) R25C.1@2196.85,3325 ; R25B.1@5678.15,3900 v1(5750,3900) ; R25A.1@5678.15,5075 5678.15,5148.03 v1@5680.12,5150
  Top Layer w100: v1(3225,3100) 3225,3375 3269,3419 3269,3423.2 3370.8,3525 BATT.2@3400,3525
  Bottom Layer w12: v1(2775,4550) 2775,4650 v1(2750,4675) 2750,5095.26 2879.74,5225 3150,5225 v1(3175,5200) ; v1(3400,4250) 3434.84,4215.16 3484.84,4215.16 3543,4157 ; v1(3575,4125) 3543,4157 ; C25.2@3792.72,4086.81 3769.49,4110.04 C24.1@3769.49,4172.24 ; U11.9@3840.55,4219.68 3816.93,4219.68 C24.1@3769.49,4172.24 ; U11.11@3840.55,4259.05 3795.47,4259.05 C23.1@3770.28,4284.25 ; v1@3850,4941.49 4033.51,4941.49 v1(4150,4825) ; v1(3925,3500) 3918,3493 3918,3311.75 3936.75,3293 4197.75,3293 4336.75,3432 4363.25,3432 4420.25,3375 v1(4725,3375) ; U11.1@3969.49,4149.8 3994.29,4125 v1(4050,4125) ; v1(4025,3625) 4075,3675 SER1.3@4125,3675 ; 4100,4320.25 4075,4345.25 4069.49,4339.74 C26.2@4069.49,4327.36 4051.38,4309.25 U11.18@3969.49,4309.25 3969.49,4375.77 3938.25,4407 3787.47,4407 3740.56,4360.09 3740.56,4350 ; 4157.46,4262.8 4250,4170.25 4250,4045.25 4243,4038.25 4243,3982 v1(4250,3975) ; v1(5100,4100) 5132,4132 5290.22,4132 5297.22,4125 5781,4125 ; 3543,4157 3543,4288.25 3561.75,4307 3697.56,4307 3740.56,4350 ; 3740.56,4350 3740.56,4313.97 C23.1@3770.28,4284.25 ; C24.1@3769.49,4172.24 3739.77,4201.96 3739.77,4253.75 C23.1@3770.28,4284.25
  Bottom Layer w25: v1(4600,5000) 4600.97,4999.03 4900.97,4999.03 ; 5025,4875 5100,4950 v1(5125,4950)
  Bottom Layer w30: 2088.98,4275 v1(2300,4275) ; v1(3175,5200) 3207.02,5232.02 3627.65,5232.02 3850,5009.67 v1(3850,4950) v1@3850,4941.49 ; v1(3925,3500) 4032.95,3392.05 4181.71,3392.05 4314.67,3525 v1(4425,3525) 4466,3566 4626.76,3566 4721,3660.24 4721,3754.07 4687.54,3787.54 4687.54,4060.3 USB2.4@4485.04,4262.8 4157.46,4262.8 4100,4320.25 ; v1(4150,4825) v1(4325,4650) ; v1(5100,4100) 5250,3950 v1(5250,3875)
  Bottom Layer w50: 2075,4252.97 2088.98,4238.98 ; v1(2125,4500) 2088.98,4463.98 2088.98,4275 2088.98,4238.98 ; v1(2150,3325) 2401,3074 2874,3074 2874,3100 ; v1(2725,3475) 2768,3518 2809.97,3518 ; v1(3225,3100) 2874,3100 ; 2088.98,4238.98 2809.97,3518 ; 2809.97,3518 2862.11,3518 2949.03,3431.08 2949.03,3178.88 2919.15,3149 2876.91,3149 2874,3146.09 2874,3100
  Bottom Layer w100: BATT.2@3350,3575 BATT.2@3400,3525 ; BATT.2@3450,3475 BATT.2@3400,3525 ; 3575,3525 BATT.2@3400,3525 ; v1(5675,5150) 5474,5351 5020.49,5351 4900.97,5231.48 4900.97,4999.03 5025,4875 5551,4349 5725.91,4349 5806,4268.91 5806,4150 5781,4125 5781,3931 v1(5750,3900)
  other v2: 3225,3175
M1A: R17A.1 T1A.3 T1A.7 T1A.8 | length 1431.5
  Top Layer w12: R17A.1@4925,5079.53 4972.44,5079.53 v1(4976.97,5075) ; T1A.7@5742.52,4475 5742.52,4500 ; T1A.8@5742.52,4525 5742.52,4500 ; v1(5801.97,4500) 5742.52,4500
  Top Layer w30: T1A.3@5557.48,4425 v1(5651.97,4425)
  Bottom Layer w12: v1(4976.97,5075) 5059.65,5075 5626.97,4507.68 5626.97,4425 v1(5651.97,4425)
  Bottom Layer w30: v1(5651.97,4425) 5726.97,4500 v1(5801.97,4500)
M1B: R17B.1 T1B.3 T1B.7 T1B.8 | length 1377.8
  Top Layer w12: R17B.1@4925,3904.53 4972.44,3904.53 v1(4976.97,3900) ; T1B.7@5742.52,3300 5742.52,3325 ; T1B.8@5742.52,3350 5742.52,3325 ; v1(5801.97,3325) 5742.52,3325
  Top Layer w30: T1B.3@5557.48,3250 5600,3250 v1(5625,3275)
  Bottom Layer w12: v1(4976.97,3900) 5025,3900 v1@5641.77,3283.23 ; v1(5625,3275) 5650,3275
  Bottom Layer w30: v1(5625,3275) v1@5641.77,3283.23 ; 5650,3275 5700,3325 v1(5801.97,3325)
M1C: R17C.1 T1C.3 T1C.7 T1C.8 | length 1508.5
  Top Layer w12: v1(2073.03,3900) 2132.48,3900 ; T1C.8@2132.48,3875 2132.48,3900 ; T1C.7@2132.48,3925 2132.48,3900 ; v1(2898.03,3325) 2902.56,3320.47 R17C.1@2950,3320.47
  Top Layer w30: v1(2223.03,3975) T1C.3@2317.52,3975
  Bottom Layer w12: v1(2223.03,3975) 2248.03,3975 2248.03,3899.64 2709.67,3438 2740.33,3438 2757.33,3455 2872.78,3455 2905,3422.78 2905,3331.97 v1(2898.03,3325)
  Bottom Layer w30: v1(2073.03,3900) 2148.03,3900 v1(2223.03,3975)
M1D: R17D.1 T1D.3 T1D.7 T1D.8 | length 1455.2
  Top Layer w12: v1(2073.03,5075) 2132.48,5075 ; T1D.8@2132.48,5050 2132.48,5075 ; T1D.7@2132.48,5100 2132.48,5075 ; v1(2898.03,4500) 2902.56,4495.47 R17D.1@2950,4495.47
  Top Layer w30: v1(2223.03,5150) T1D.3@2317.52,5150
  Bottom Layer w12: v1(2223.03,5150) 2248.03,5150 2248.03,5026.97 2775,4500 v1(2898.03,4500)
  Bottom Layer w30: v1(2073.03,5075) 2148.03,5075 v1(2223.03,5150)
M2A: R20A.1 T2A.3 T2A.7 T2A.8 | length 1346.7
  Top Layer w12: R20A.1@4925,5204.53 4972.44,5204.53 v1(4976.97,5200) ; T2A.7@5742.52,4700 T2A.8@5742.52,4750 ; T2A.8@5751.97,4750 5776.97,4750 v1(5801.97,4725)
  Top Layer w30: T2A.3@5557.48,4650 5600,4650 v1(5625,4625)
  Bottom Layer w12: v1(4976.97,5200) 5526.97,4650 5600,4650 v1(5625,4625)
  Bottom Layer w30: v1(5625,4625) 5725,4725 v1(5801.97,4725)
M2B: R20B.1 T2B.3 T2B.7 T2B.8 | length 1346.7
  Top Layer w12: R20B.1@4925,4029.53 4972.44,4029.53 v1(4976.97,4025) ; T2B.7@5742.52,3525 T2B.8@5742.52,3575 ; T2B.8@5751.97,3575 5776.97,3575 v1(5801.97,3550)
  Top Layer w30: T2B.3@5557.48,3475 5600,3475 v1(5625,3450)
  Bottom Layer w12: v1(4976.97,4025) 5526.97,3475 5600,3475 v1(5625,3450)
  Bottom Layer w30: v1(5625,3450) 5725,3550 v1(5801.97,3550)
M2C: R20C.1 T2C.3 T2C.7 T2C.8 | length 1497.8
  Top Layer w12: v1(2073.03,3675) 2098.03,3650 T2C.8@2123.03,3650 ; T2C.8@2132.48,3650 T2C.7@2132.48,3700 ; v1(2898.03,3200) 2902.56,3195.47 R20C.1@2950,3195.47
  Top Layer w30: v1(2250,3775) 2275,3750 T2C.3@2317.52,3750
  Bottom Layer w12: v1(2250,3775) 2275,3750 2348.03,3750 2678.03,3420 2848.33,3420 2865.33,3437 2887,3415.33 2887,3359.22 2866.03,3338.25 2866.03,3232 v1(2898.03,3200)
  Bottom Layer w30: v1(2073.03,3675) 2150,3675 v1(2250,3775)
M2D: R20D.1 T2D.3 T2D.7 T2D.8 | length 1346.7
  Top Layer w12: v1(2073.03,4850) 2098.03,4825 T2D.8@2123.03,4825 ; T2D.8@2132.48,4825 T2D.7@2132.48,4875 ; v1(2898.03,4375) 2902.56,4370.47 R20D.1@2950,4370.47
  Top Layer w30: v1(2250,4950) 2275,4925 T2D.3@2317.52,4925
  Bottom Layer w12: v1(2250,4950) 2275,4925 2324.54,4925 2767.54,4482 2791.03,4482 v1(2898.03,4375)
  Bottom Layer w30: v1(2073.03,4850) 2150,4850 v1(2250,4950)
M3A: R23A.2 T3A.3 T3A.7 T3A.8 | length 1527.5
  Top Layer w12: R23A.2@4925,5329.53 4938.47,5343 5659.56,5343 5742.52,5260.04 T3A.8@5742.52,4975 5742.52,4950 ; T3A.7@5742.52,4925 5742.52,4950 ; v1(5801.97,4950) 5742.52,4950
  Top Layer w30: T3A.3@5557.48,4875 v1(5626.97,4875)
  Bottom Layer w30: v1(5626.97,4875) 5726.97,4875 v1(5801.97,4950)
M3B: R23B.2 T3B.3 T3B.7 T3B.8 | length 1585.1
  Top Layer w12: R23B.2@4925,4154.53 4938.47,4168 5659.56,4168 5812,4015.56 5812,3869.48 T3B.8@5742.52,3800 5742.52,3775 ; T3B.7@5742.52,3750 5742.52,3775 ; v1(5801.97,3775) 5742.52,3775
  Top Layer w30: T3B.3@5557.48,3700 v1(5626.97,3700)
  Bottom Layer w30: v1(5626.97,3700) 5726.97,3700 v1(5801.97,3775)
M3C: R23C.2 T3C.3 T3C.7 T3C.8 | length 1543.6
  Top Layer w12: v1(2073.03,3450) 2132.48,3450 ; T3C.7@2132.48,3475 2132.48,3450 ; R23C.2@2950,3070.47 2936.53,3057 2215.44,3057 2113,3159.44 2113,3340.33 2132.48,3359.81 2132.48,3450
  Top Layer w30: v1(2248.03,3525) T3C.3@2317.52,3525
  Bottom Layer w30: v1(2073.03,3450) 2148.03,3525 v1(2248.03,3525)
M3D: R23D.2 T3D.3 T3D.7 T3D.8 | length 1564.4
  Top Layer w12: v1(2073.03,4625) 2132.48,4625 ; T3D.7@2132.48,4650 2132.48,4625 ; R23D.2@2950,4245.47 2936.53,4232 2215.44,4232 2088,4359.44 2088,4580.52 2132.48,4625
  Top Layer w30: v1(2248.03,4700) T3D.3@2317.52,4700
  Bottom Layer w30: v1(2073.03,4625) 2148.03,4700 v1(2248.03,4700)
MOTOR_CURRENTA: C12A.2 R30A.2 U3A.4 | length 840.4
  Top Layer w12: U3A.4@4814.17,4639.57 4809.44,4644.3 4773.05,4644.3 4760.84,4656.52 4760.84,4724.98 4786,4750.14 4786,4943.67 4835.52,4993.19 5073.31,4993.19 5122.44,5042.33 R30A.2@5122.44,5075 ; R30A.2@5126.97,5075 C12A.2@5126.97,5147.44
MOTOR_CURRENTB: C12B.2 R30B.2 U3B.4 | length 843.8
  Top Layer w12: U3B.4@4814.17,3464.57 4777.79,3464.57 4760.83,3481.52 4760.83,3498.8 4764.99,3502.95 4760.83,3507.11 4760.83,3549.98 4793,3582.14 4793,3617.68 4805.69,3630.38 4805.69,3788.36 4835.52,3818.19 5073.31,3818.19 5122.44,3867.33 R30B.2@5122.44,3900 ; R30B.2@5126.97,3900 C12B.2@5126.97,3972.44
MOTOR_CURRENTC: C12C.2 R30C.2 U3C.4 | length 840.4
  Top Layer w12: C12C.2@2748.03,3252.56 R30C.2@2748.03,3325 ; R30C.2@2752.56,3325 2752.56,3357.67 2801.69,3406.81 3039.48,3406.81 3089,3456.33 3089,3649.86 3114.17,3675.02 3114.17,3743.48 3101.95,3755.7 3065.56,3755.7 U3C.4@3060.83,3760.43
MOTOR_CURRENTD: C12D.2 R30D.2 U3D.4 | length 880.5
  Top Layer w12: C12D.2@2748.03,4427.56 R30D.2@2748.03,4500 ; R30D.2@2752.56,4500 2743,4509.56 2743,4563.25 2761.75,4582 2788.25,4582 2788.45,4581.81 3039.48,4581.81 3057.87,4600.19 3057.87,4648.44 3064.09,4654.66 3064.09,4681.17 3057.87,4687.39 3057.87,4793.72 3114.17,4850.02 3114.17,4892.89 3110.01,4897.05 3114.17,4901.2 3114.17,4918.48 3101.95,4930.7 3065.56,4930.7 U3D.4@3060.83,4935.43
NetC2A_2: C2A.2 U3A.20 | length 289.7
  Top Layer w12: U3A.20@5085.83,4511.61 5124.34,4511.61 5140.66,4495.28 5140.66,4379.22 C2A.2@5219.88,4300